# Altium PCB V2_PCB.PcbDoc (part 1 of 2)
Units mil, origin at the board's own origin, x right, y up, seen from the top; angles counter-clockwise.
Board outline 7874.02 x 5669.29 mil, 2 copper layers (Top Layer, Bottom Layer); 198 components, 155 nets, 639 pads, 218 vias.
Unrouted connection lines stored in the file: 3.
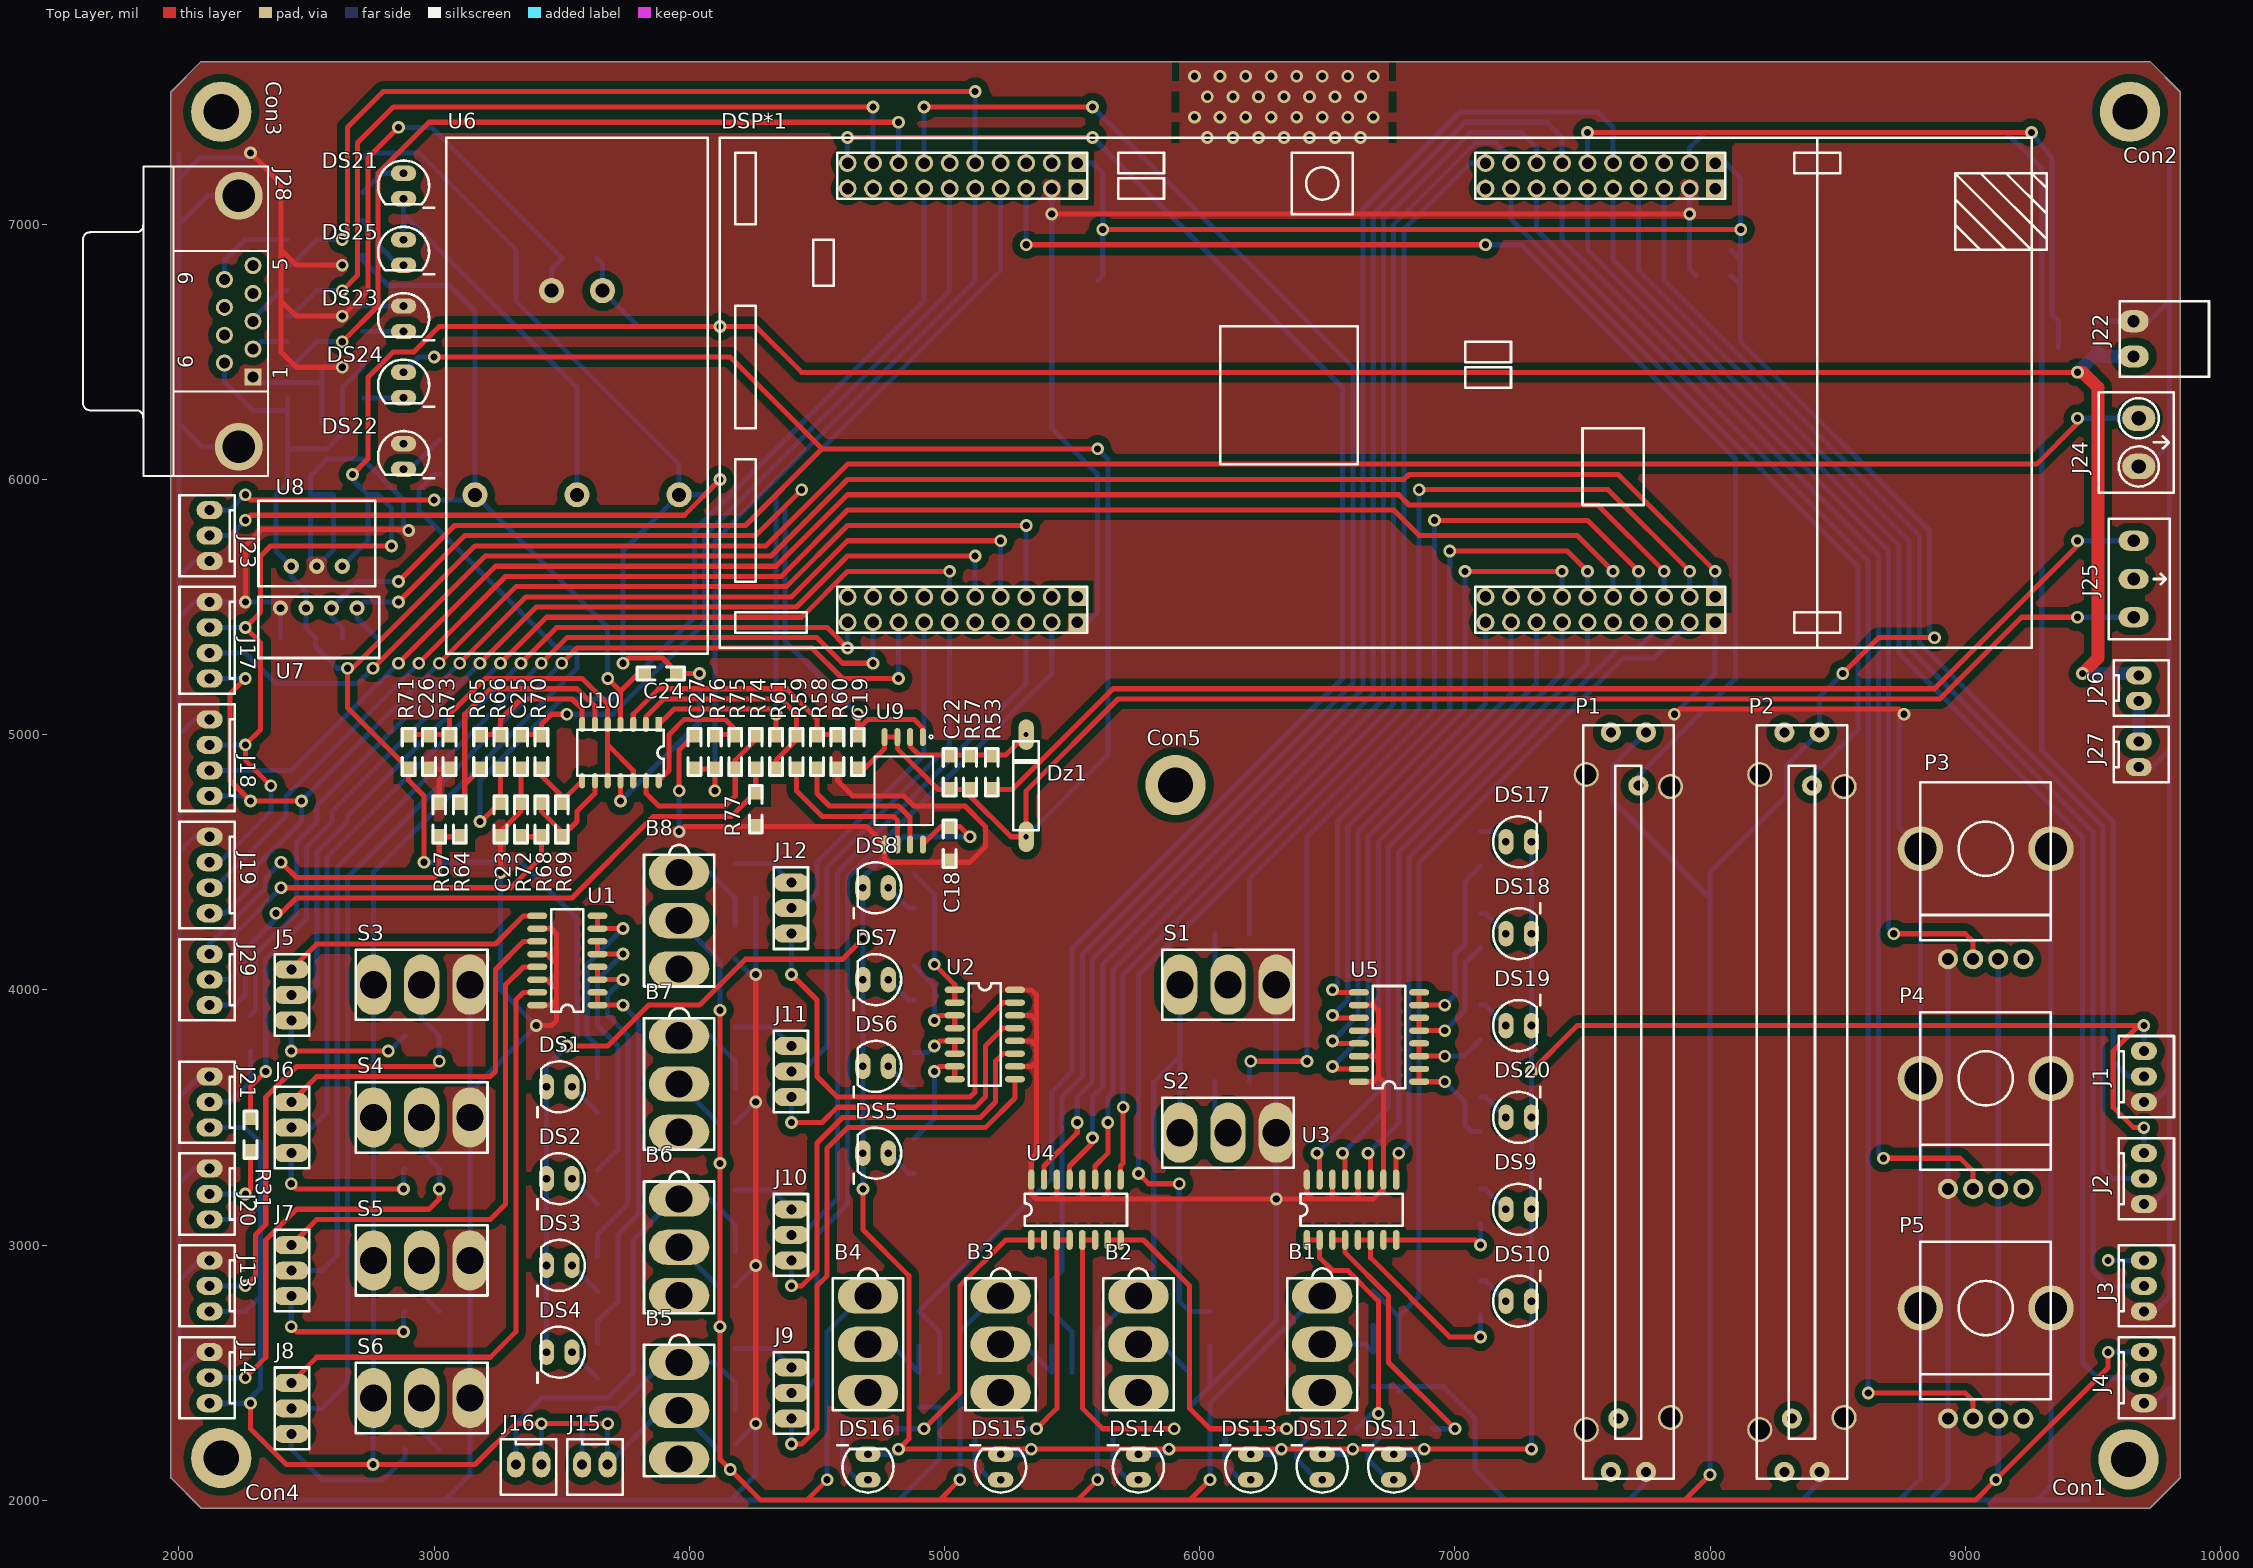
[diagram p0: Top Layer view]
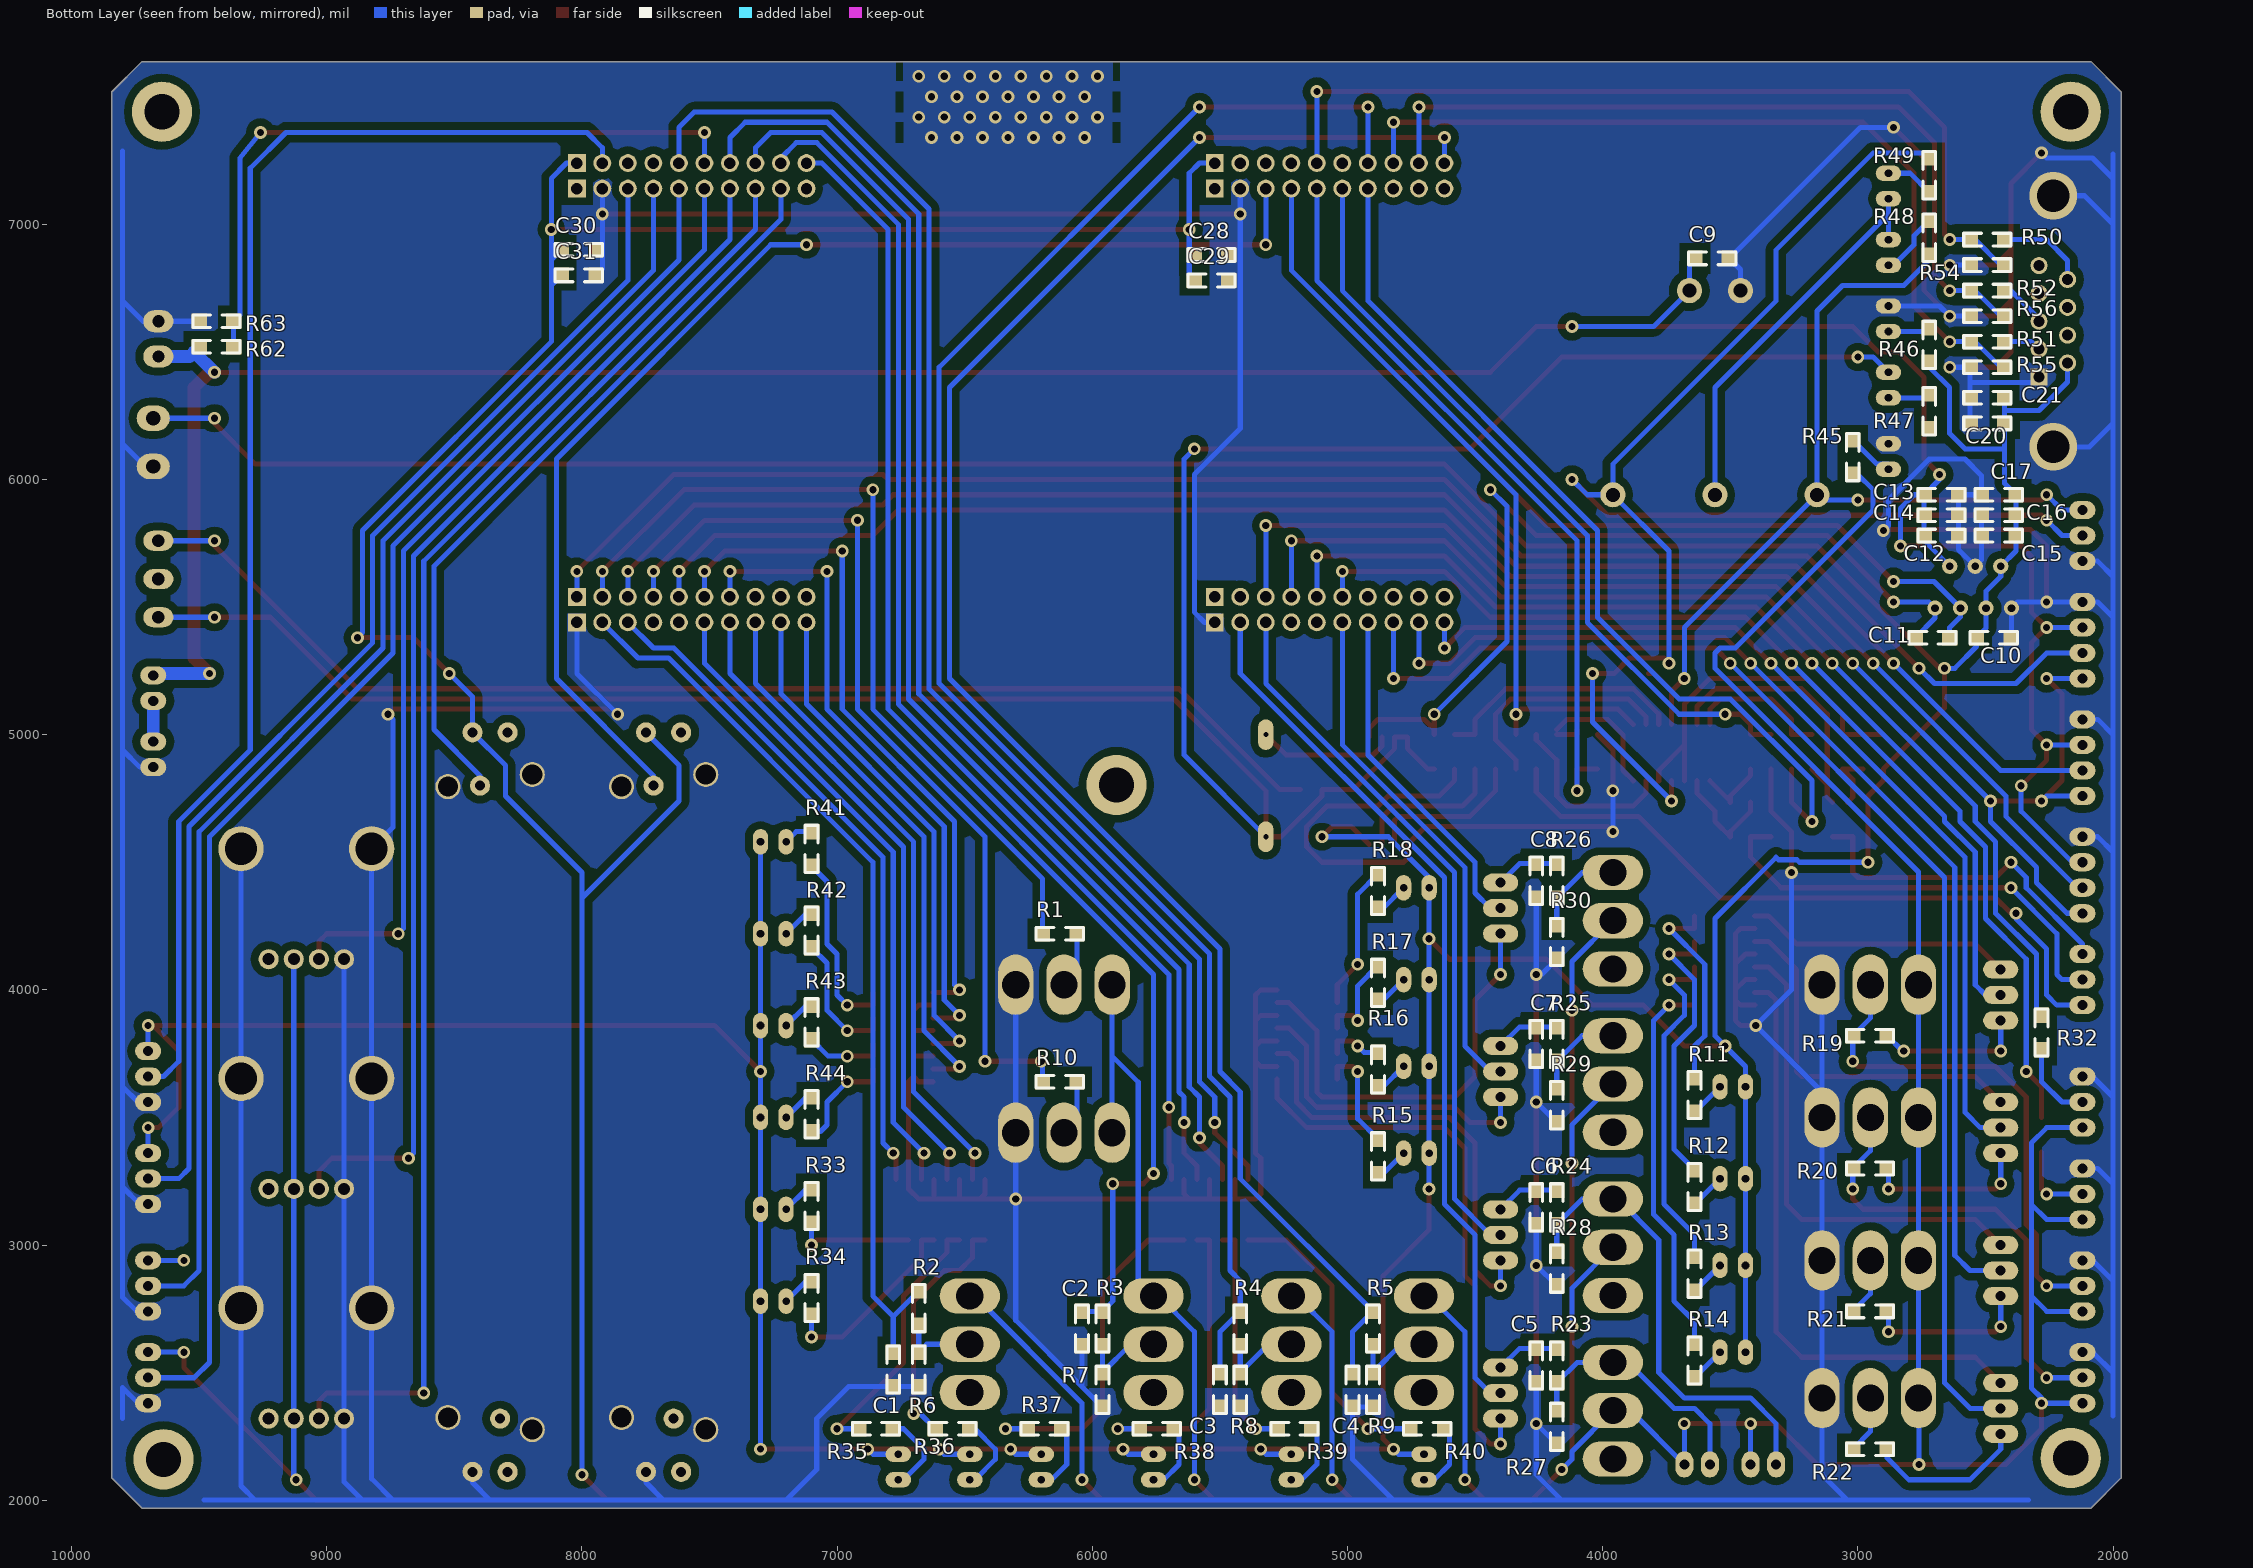
[diagram p1: Bottom Layer view, seen from below]

## Layer stack, top to bottom
Top Solder: solder mask 0.4, Solder Resist, Dk 3.5
Top Layer: signal copper 1.4
Dielectric 1: dielectric 12.6, FR-4, Dk 4.8
Bottom Layer: signal copper 1.4
Bottom Solder: solder mask 0.4, Solder Resist, Dk 3.5

## Board outline
2086.61,1968.5 9724.41,1968.5 9842.52,2086.61 9842.52,7519.69 9724.41,7637.8 2086.61,7637.8 1968.5,7519.69 1968.5,2086.61

## Design rules (kind name [scope] priority, off if disabled: settings)
Clearance [All] p1: gap=15 except(30: Arc-Poly Track-Poly SMDPad-Poly THPad-Poly Via-Poly Fill-Poly Poly-Poly)
ComponentClearance [All] p1: gap=10 collisioncheckmode=3 verticalgap=196.85 showdistances=FALSE
PlaneConnect [All] p1: planeconnectstyle=Direct reliefexpansion=20 reliefentries=4 reliefconductorwidth=10 reliefairgap=10
PolygonConnect [All] p1: connectstyle=Direct reliefconductorwidth=10 reliefentries=4 polygonreliefangle="90 Angle" airgapwidth=10
RoutingVias [All] p1: holewidth=28 width=50 viastyle="Through Hole" minholewidth=28 minwidth=50 maxholewidth=28 maxwidth=50
SolderMaskExpansion [All] p1: expansion=4
Width [All] p1: maxlimit=100 minlimit=10 preferedwidth=20
28 further rules are at their usual default settings.

## Classes and differential pairs
component class Supplies: C9 C10 C11 C12 C13 C14 C15 C16 C17 DS21 DS22 DS23 DS24 DS25 DS? J22 J23 J24 J25 J26 J27 J? R45 R46 R47 R48 R49 R? U6 U7 U8 U?
component class InputsExtras: B5 B6 B7 B8 C5 C6 C7 C8 DS1 DS2 DS3 DS4 DS5 DS6 DS7 DS8 J5 J6 J7 J8 J9 J10 J11 J12 J13 J14 J15 J16 R11 R12 R13 R14 R15 R16 R17 R18 R19 R20 R21 R22 R23 R24 R25 R26 R27 R28 R29 R30 S3 S4 S5 S6 U1 U2
component class Inputs: B1 B2 B3 B4 C1 C2 C3 C4 J1 J2 J3 J4 P1 P2 P3 P4 P5 R1 R2 R3 R4 R5 R6 R7 R8 R9 R10 S1 S2
component class DSP: C28 C29 C30 C31 DSP*1
component class SignalProcessing: C18 C19 C20 C21 C22 C23 C24 C25 C26 C27 Dz1 J28 J29 R50 R51 R52 R53 R54 R55 R56 R57 R58 R59 R60 R61 R62 R63 R64 R65 R66 R67 R68 R69 R70 R71 R72 R73 R74 R75 R76 R77 U9 U10
component class Outputs: Con1 Con2 Con3 Con4 Con5 DS9 DS10 DS11 DS12 DS13 DS14 DS15 DS16 DS17 DS18 DS19 DS20 J17 J18 J19 J20 J21 R31 R32 R33 R34 R35 R36 R37 R38 R39 R40 R41 R42 R43 R44 U3 U4 U5

## Components (designator, comment, footprint, x,y, rotation, side; value= is the part's Value field where it differs from the comment)
B1 "Button_TH" BUTTONTH 6480,2800 r270 top
B2 "Button_TH" BUTTONTH 5760,2800 r270 top
B3 "Button_TH" BUTTONTH 5220,2800 r270 top
B4 "Button_TH" BUTTONTH 4700,2800 r270 top
B5 "Button_TH" BUTTONTH 3960,2540 r270 top
B6 "Button_TH" BUTTONTH 3960,3180 r270 top
B7 "Button_TH" BUTTONTH 3960,3820 r270 top
B8 "Button_TH" BUTTONTH 3960,4460 r270 top
C1 "nF" 1206 6780,2580 r270 bottom
C2 "nF" 1206 6040,2740 r270 bottom
C3 "nF" 1206 5500,2500 r270 bottom
C4 "nF" 1206 4980,2500 r270 bottom
C5 "nF" 1206 4260,2460 r90 bottom
C6 "nF" 1206 4260,3080 r90 bottom
C7 "nF" 1206 4260,3720 r90 bottom
C8 "nF" 1206 4260,4360 r90 bottom
C9 "100nF" 1206 3638.27,6866.61 r180 bottom
C10 "100nF" 1206 2400,5380 r0 bottom
C11 "100nF" 1206 2640,5380 r0 bottom
C12 "100nF" 1206 2740,5780 r180 bottom
C13 "100nF" 1206 2740,5940 r180 bottom
C14 "100nF" 1206 2740,5860 r180 bottom
C15 "100nF" 1206 2380,5780 r0 bottom
C16 "100nF" 1206 2380,5860 r0 bottom
C17 "100nF" 1206 2380,5940 r0 bottom
C18 "100nF" 1206 5020,4640 r270 top
C19 "100nF" 1206 4660,5000 r270 top
C20 "1uF" 1206 2560,6220 r180 bottom
C21 "100nF" 1206 2560,6320 r180 bottom
C22 "10nF" 1206 5020,4920 r270 top
C23 "100nF" 1206 3260,4600 r90 top
C24 "100nF" 1206 3820,5240 r0 top
C25 "100nF" 1206 3340,5000 r270 top
C26 "10nF" 1206 2980,5000 r270 top
C27 "100nF" 1206 4020,5000 r270 top
C28 "nF" 1206 5600,6880 r180 bottom
C29 "nF" 1206 5600,6780 r180 bottom
C30 "nF" 1206 8080,6900 r180 bottom
C31 "nF" 1206 8080,6800 r180 bottom
Con1 "CON1" SUPPORT 9640,2160 r0 top
Con2 "CON1" SUPPORT 9645.67,7440.94 r0 top
Con3 "CON1" SUPPORT 2165.35,7440.94 r0 top
Con4 "CON1" SUPPORT 2165.35,2165.35 r0 top
Con5 "CON1" SUPPORT 5905.51,4803.15 r0 top
DS1 "Verde" LED_100MIL 3440,3620 r90 top
DS2 "Verde" LED_100MIL 3440,3260 r90 top
DS3 "Verde" LED_100MIL 3440,2920 r90 top
DS4 "Verde" LED_100MIL 3440,2580 r90 top
DS5 "Verde" LED_100MIL 4680,3360 r90 top
DS6 "Verde" LED_100MIL 4680,3700 r90 top
DS7 "Verde" LED_100MIL 4680,4040 r90 top
DS8 "Verde" LED_100MIL 4680,4400 r90 top
DS9 "Verde" LED_100MIL 7300,3140 r270 top
DS10 "Verde" LED_100MIL 7300,2780 r270 top
DS11 "Verde" LED_100MIL 6760,2180 r0 top
DS12 "Verde" LED_100MIL 6480,2180 r0 top
DS13 "Verde" LED_100MIL 6200,2180 r0 top
DS14 "Verde" LED_100MIL 5760,2180 r0 top
DS15 "Verde" LED_100MIL 5220,2180 r0 top
DS16 "Verde" LED_100MIL 4700,2180 r0 top
DS17 "Verde" LED_100MIL 7300,4580 r270 top
DS18 "Verde" LED_100MIL 7300,4220 r270 top
DS19 "Verde" LED_100MIL 7300,3860 r270 top
DS20 "Verde" LED_100MIL 7300,3500 r270 top
DS21 "Verde" LED_100MIL 2880,7100 r180 top
DS22 "Verde" LED_100MIL 2880,6040 r180 top
DS23 "Verde" LED_100MIL 2880,6580 r180 top
DS24 "Verde" LED_100MIL 2880,6320 r180 top
DS25 "Verde" LED_100MIL 2880,6840 r180 top
DSP*1 "F28069M_DevelopmentBoard" F28069M_DevelopmentBoardDOWN 8020,7240 r270 top
Dz1 "v" DIODO 5320,4600 r90 top
J1 "Cleva 2 vias" CON3_KK_256 9700,3760 r270 top
J2 "Cleva 2 vias" CON3_KK_256 9700,3360 r270 top
J3 "Cleva 2 vias" CON3_KK_256 9700,2940 r270 top
J4 "Cleva 2 vias" CON3_KK_256 9700,2580 r270 top
J5 "Cleva 2 vias" CON_3_100MILIS 2440,3880 r180 top
J6 "Cleva 2 vias" CON_3_100MILIS 2440,3360 r180 top
J7 "Cleva 2 vias" CON_3_100MILIS 2440,2800 r180 top
J8 "Cleva 2 vias" CON_3_100MILIS 2440,2260 r180 top
J9 "Cleva 2 vias" CON_3_100MILIS 4400,2520 r0 top
J10 "Cleva 2 vias" CON_3_100MILIS 4400,3140 r0 top
J11 "Cleva 2 vias" CON_3_100MILIS 4400,3780 r0 top
J12 "Cleva 2 vias" CON_3_100MILIS 4400,4420 r0 top
J13 "Cleva 2 vias" CON3_KK_256 2120,2740 r90 top
J14 "Cleva 2 vias" CON3_KK_256 2120,2380 r90 top
J15 "Cleva 2 vias" CON2_KK_256 3680,2140 r180 top
J16 "Cleva 2 vias" CON2_KK_256 3420,2140 r180 top
J17 "Cleva 2 vias" CON4_KK_256 2120,5220 r90 top
J18 "Cleva 2 vias" CON4_KK_256 2120,4760 r90 top
J19 "Cleva 2 vias" CON4_KK_256 2120,4300 r90 top
J20 "Cleva 2 vias" CON3_KK_256 2120,3100 r90 top
J21 "Cleva 2 vias" CON3_KK_256 2120,3460 r90 top
J22 "Cleva 2 vias" Con2_ExtronSide_3.5mmPitch 9660,6620 r270 top
J23 "Cur_meas_con" CON3_KK_256 2120,5680 r90 top
J24 "Cleva 2 vias" Clema_2_vias 9680,6240 r270 top
J25 "Cleva 2 vias" Con3_150milPitch 9660,5760 r270 top
J26 "Cleva 2 vias" CON2_KK_256 9680,5232.6 r270 top
J27 "Cleva 2 vias" CON2_KK_256 9680,4972.6 r270 top
J28 "D Connector 9" DSUB1.385-2H9 1860,6620 r90 top
J29 "Cleva 2 vias" Con3_KK_256 2120,3940 r90 top
P1 "POT" SliderPot_PTA6044 7680,3560 r270 top
P2 "POT" SliderPot_PTA6044 8360,3560 r270 top
P3 "POT" POT_RK11K1140A3L 9080,4120 r0 top
P4 "POT" POT_RK11K1140A3L 9080,3220 r0 top
P5 "POT" POT_RK11K1140A3L 9080,2320 r0 top
R1 "RK" 1206 6060,4220 r0 bottom
R2 "RK" 1206 6680,2820 r270 bottom
R3 "RK" 1206 5960,2740 r270 bottom
R4 "RK" 1206 5420,2740 r270 bottom
R5 "RK" 1206 4900,2740 r270 bottom
R6 "RK" 1206 6680,2580 r270 bottom
R7 "RK" 1206 5960,2500 r270 bottom
R8 "RK" 1206 5420,2500 r270 bottom
R9 "RK" 1206 4900,2500 r270 bottom
R10 "RK" 1206 6060,3640 r0 bottom
R11 "RK" 1206 3640,3520 r90 bottom
R12 "RK" 1206 3640,3160 r90 bottom
R13 "RK" 1206 3640,2820 r90 bottom
R14 "RK" 1206 3640,2480 r90 bottom
R15 "RK" 1206 4880,3280 r90 bottom
R16 "RK" 1206 4880,3620 r90 bottom
R17 "RK" 1206 4880,3960 r90 bottom
R18 "RK" 1206 4880,4320 r90 bottom
R19 "RK" 1206 3020,3820 r180 bottom
R20 "RK" 1206 3020,3300 r180 bottom
R21 "RK" 1206 3020,2740 r180 bottom
R22 "RK" 1206 3020,2200 r180 bottom
R23 "RK" 1206 4180,2460 r90 bottom
R24 "RK" 1206 4180,3080 r90 bottom
R25 "RK" 1206 4180,3720 r90 bottom
R26 "RK" 1206 4180,4360 r90 bottom
R27 "RK" 1206 4180,2220 r90 bottom
R28 "RK" 1206 4180,2840 r90 bottom
R29 "RK" 1206 4180,3480 r90 bottom
R30 "RK" 1206 4180,4120 r90 bottom
R31 "RK" 1206 2280,3500 r270 top
R32 "RK" 1206 2280,3900 r270 bottom
R33 "RK" 1206 7100,3220 r270 bottom
R34 "RK" 1206 7100,2860 r270 bottom
R35 "RK" 1206 6780,2280 r0 bottom
R36 "RK" 1206 6480,2280 r0 bottom
R37 "RK" 1206 6120,2280 r0 bottom
R38 "RK" 1206 5680,2280 r0 bottom
R39 "RK" 1206 5140,2280 r0 bottom
R40 "RK" 1206 4620,2280 r0 bottom
R41 "RK" 1206 7100,4620 r270 bottom
R42 "RK" 1206 7100,4300 r270 bottom
R43 "RK" 1206 7100,3940 r270 bottom
R44 "RK" 1206 7100,3580 r270 bottom
R45 "65R" 1206 3020,6020 r90 bottom
R46 "150R" 1206 2720,6460 r90 bottom
R47 "150R" 1206 2720,6200 r90 bottom
R48 "650R" 1206 2720,6880 r90 bottom
R49 "650R" 1206 2720,7260 r270 bottom
R50 "1k" 1206 2560,6940 r180 bottom
R51 "1k" 1206 2560,6540 r180 bottom
R52 "1k" 1206 2560,6740 r180 bottom
R53 "21.5k" 1206 5185,4920 r270 top
R54 "1.78k" 1206 2560,6840 r180 bottom
R55 "1.78k" 1206 2560,6440 r180 bottom
R56 "1.78k" 1206 2560,6640 r180 bottom
R57 "1k" 1206 5100,4920 r270 top
R58 "10k" 1206 4500,5000 r270 top
R59 "10k" 1206 4420,5000 r270 top
R60 "16.2k" 1206 4580,4865 r90 top
R61 "16.2k" 1206 4340,5000 r270 top
R62 "8.2k" 1206 9500,6520 r180 bottom
R63 "1k" 1206 9500,6620 r180 bottom
R64 "10k" 1206 3100,4600 r90 top
R65 "10k" 1206 3180,5000 r270 top
R66 "2.61k" 1206 3260,5000 r270 top
R67 "9.09R" 1206 3020,4600 r90 top
R68 "10k" 1206 3420,4600 r90 top
R69 "10k" 1206 3500,4600 r90 top
R70 "2.61k" 1206 3420,5000 r270 top
R71 "61.9k" 1206 2900,5000 r270 top
R72 "9.09R" 1206 3340,4600 r90 top
R73 "12.1k" 1206 3060,5000 r270 top
R74 "10k" 1206 4260,5000 r270 top
R75 "10k" 1206 4180,5000 r270 top
R76 "2.61k" 1206 4100,5000 r270 top
R77 "9.09R" 1206 4260,4640 r90 top
S1 "Switch" SWITCHTH_2POS 6300,4020 r180 top
S2 "Switch" SWITCHTH_2POS 6300,3440 r180 top
S3 "Switch" SWITCHTH_2POS 3140,4020 r180 top
S4 "Switch" SWITCHTH_2POS 3140,3500 r180 top
S5 "Switch" SWITCHTH_2POS 3140,2940 r180 top
S6 "Switch" SWITCHTH_2POS 3140,2400 r180 top
U1 "MMPQ3904" SO-16 3640,3940 r180 top
U2 "MMPQ3904" SO-16 5040,4000 r0 top
U3 "MMPQ3904" SO-16 6420,3020 r90 top
U4 "MMPQ3904" SO-16 5340,3020 r90 top
U5 "MMPQ3904" SO-16 6860,3640 r180 top
U6 "TEL15-2423" TEL15-2423 3560,6340 r270 top
U7 "CRE1S0505" CRE1S0505SC 2547.72,5496.06 r0 top
U8 "TSR 1-2450" "TSR 1-2450" 2540,5660 r180 top
U9 "ACPL-C870-000E" SOIC127P1150X360-8N 4840,4780 r270 top
U10 "LM324" SOIC_14 3880,5040 r270 top

## Footprints (in the part's own frame and the unit in brackets; to place one, negate y for a bottom-side part, rotate by r counter-clockwise, add the part's x,y. Pads: shape width x height; smd on the part's side, far side on the other; paste and mask are expansions set on the pad)
1206 [mil] "SMD R&C"
  rect 60x60 smd: 1(0,0) 2(135,0)
  silkscreen extent -25,-25 160,25
BUTTONTH [mm]
  oval 3.5x6 hole 2.7: 0(0,0) 1(4.8,0) 2(9.6,0)
  silkscreen extent -2.75,-3.5 11.35,3.5
Clema_2_vias [mm] "Conector 2 vias"
  oval 2.54x3.302 hole 1.4: 1(0,0) 2(4.8,0)
  silkscreen extent -2.6,-4 7.4,3.5
Con2_ExtronSide_3.5mmPitch [mm]
  oval 2.2x3 hole 1.2: 1(0,0) 2(3.5,0)
  silkscreen extent -2,-1.4 5.5,7.5
CON2_KK_256 [mm]
  oval 1.8x2.6 hole 1: 1(0,0) 2(2.54,0)
  silkscreen extent -1.5,-2.5 4.04,3
Con3_150milPitch [mm]
  oval 2x3 hole 1.27: 1(0,0) 2(3.81,0) 3(7.62,0)
  silkscreen extent -2.2,-2.5 9.8,3.6
CON3_KK_256 [mm]
  oval 1.8x2.6 hole 1: 1(0,0) 2(2.54,0) 3(5.08,0)
  silkscreen extent -1.5,-2.5 6.58,3
Con3_KK_256 [mm]
  oval 1.8x2.6 hole 1: 1(0,0) 2(2.54,0) 3(5.08,0)
  silkscreen extent -1.5,-2.5 6.58,3
CON4_KK_256 [mm]
  oval 1.8x2.6 hole 1: 1(0,0) 2(2.54,0) 3(5.08,0) 4(7.62,0)
  silkscreen extent -1.5,-2.5 9.12,3
CON_3_100MILIS [mm]
  oval 3.5x1.8 hole 1: 1(0,0) 2(0,-2.54) 3(0,-5.08)
  silkscreen extent -1.78,-6.6 1.65,1.52
CRE1S0505SC [mil]
  round 60 hole 30: 1(-150,0) 2(-50,0) 3(50,0) 4(150,0)
  silkscreen extent -237,-196 237,44
DIODO [mil] "Diodo"
  oval 120x60 hole 20: 1(0,0) 2(400,0)
  silkscreen extent 25,-50 375,50
DSUB1.385-2H9 [mm] "Connector; D Subminiature; 9 Position; Right Angle; Pitch 1.385 mm"
  rect 1.69x1.69 hole 1.09: 1(-5.54,-10.92)
  round 1.69 hole 1.09: 2(-2.77,-10.92) 3(0,-10.92) 4(2.77,-10.92) 5(5.54,-10.92) 6(-4.155,-8.08) 7(-1.385,-8.08) 8(1.385,-8.08) 9(4.155,-8.08)
  round 4.76 hole 3.26: 10(-12.495,-9.5) 11(12.495,-9.5)
  silkscreen extent -15.4,-12.4 15.4,6
F28069M_DevelopmentBoardDOWN [mil]
  rect 70x70 hole 45: 1(0,0) 20(1800,0) 21(100,0) 40(1700,0) 41(0,-2500) 60(1800,-2500) 61(100,-2500) 80(1700,-2500)
  round 70 hole 45: 2(0,-100) 3(0,-200) 4(0,-300) 5(0,-400) 6(0,-500) 7(0,-600) 8(0,-700) 9(0,-800) 10(0,-900) 11(1800,-900) 12(1800,-800) 13(1800,-700) 14(1800,-600) 15(1800,-500) 16(1800,-400) 17(1800,-300) 18(1800,-200) 19(1800,-100) 22(100,-100) 23(100,-200) 24(100,-300) 25(100,-400) 26(100,-500) 27(100,-600) 28(100,-700) 29(100,-800) 30(100,-900) 31(1700,-900) 32(1700,-800) 33(1700,-700) 34(1700,-600) 35(1700,-500) 36(1700,-400) 37(1700,-300) 38(1700,-200) 39(1700,-100) 42(0,-2600) 43(0,-2700) 44(0,-2800) 45(0,-2900) 46(0,-3000) 47(0,-3100) 48(0,-3200) 49(0,-3300) 50(0,-3400) 51(1800,-3400) 52(1800,-3300) 53(1800,-3200) 54(1800,-3100) 55(1800,-3000) 56(1800,-2900) 57(1800,-2800) 58(1800,-2700) 59(1800,-2600) 62(100,-2600) 63(100,-2700) 64(100,-2800) 65(100,-2900) 66(100,-3000) 67(100,-3100) 68(100,-3200) 69(100,-3300) 70(100,-3400) 71(1700,-3400) 72(1700,-3300) 73(1700,-3200) 74(1700,-3100) 75(1700,-3000) 76(1700,-2900) 77(1700,-2800) 78(1700,-2700) 79(1700,-2600)
  silkscreen extent -100,-3900 1900,1300
LED_100MIL [mil] "no está modificado"
  oval 100x60 hole 30: A(0,0) K(0,-100)
  silkscreen extent -120,-150 100,35
POT_RK11K1140A3L [mm]
  round 4.5 hole 3.2: 1(-6.5,11) 1(6.5,11)
  round 2 hole 1.2: 1(-3.75,0) 2(-1.25,0) 3(1.25,0) ""(3.75,0)
  silkscreen extent -6.5,1.9 6.5,17.6
SliderPot_PTA6044 [mm]
  round 2 hole 1: 1(-36.8,1.75) 1'(-36.8,-1.75) 2(-31.5,1) 2'(31.5,-1) 3(36.8,1.75) 3'(36.8,-1.75)
  round 2.5 hole 2: 3(-32.6,-4.2) 3(-31.4,4.2) 3(31.4,4.2) 3(32.6,-4.2)
  silkscreen extent -37.5,-4.5 37.5,4.5
SO-16 [mm]
  oval 2x0.635 smd: 1(0,0) 2(0,-1.27) 3(0,-2.54) 4(0,-3.81) 5(0,-5.08) 6(0,-6.35) 7(0,-7.62) 8(0,-8.89) 9(6,-8.89) 10(6,-7.62) 11(6,-6.35) 12(6,-5.08) 13(6,-3.81) 14(6,-2.54) 15(6,-1.27) 16(6,0)
  silkscreen extent 1.4,-9.53 4.6,0.64
SOIC127P1150X360-8N [mm]
  oval 1.8x0.6 smd: 1(-5.35,1.905) 2(-5.35,0.635) 3(-5.35,-0.635) 4(-5.35,-1.905) 5(5.35,-1.905) 6(5.35,-0.635) 7(5.35,0.635) 8(5.35,1.905)
  silkscreen extent -5.54,-2.93 3.4,2.93
SOIC_14 [mil]
  rect 60x24 smd: 1(0,0)
  oval 60x24 smd: 2(0,-50) 3(0,-100) 4(0,-150) 5(0,-200) 6(0,-250) 7(0,-300) 8(220.47,-300) 9(220.47,-250) 10(220.47,-200) 11(220.47,-150) 12(220.47,-100) 13(220.47,-50) 14(220.47,0)
  silkscreen extent 20,-320 201,20
SUPPORT [mm]
  round 6 hole 3.5: 1(0,0)
SWITCHTH_2POS [mm]
  oval 3.5x6 hole 2.7: 0(0,0) 1(4.8,0) 2(9.6,0)
  silkscreen extent -1.75,-3.5 11.35,3.5
TEL15-2423 [mm]
  round 2.5 hole 1.4: 1(-10.16,2.54) 2(-10.16,-2.54) 3(10.16,-10.16) 4(10.16,0) 5(10.16,10.16)
  silkscreen extent -25.4,-13 26,13
"TSR 1-2450" [mil]
  round 60 hole 30: 1(-100,0) 2(0,0) 3(100,0)
  silkscreen extent -228,-256 228,79

## Part data
C1 C2 C3 C4 C5 C6 C7 C8 C9 C10 C11 C12 C13 C14 C15 C16 C17 C18 C19 C20 C21 C22 C23 C24 C25 C26 C27 C28 C29 C30 C31: library part Condensador, "Condensador"
DS1 DS2 DS3 DS4 DS5 DS6 DS7 DS8 DS9 DS10 DS11 DS12 DS13 DS14 DS15 DS16 DS17 DS18 DS19 DS20 DS21 DS22 DS23 DS24 DS25: library part Led
Dz1: library part Zener
J1 J2 J3 J4 J5 J6 J7 J8 J9 J10 J11 J12 J13 J14 J20 J21 J23 J25 J29: library part Con_3
J15 J16 J22 J24 J26 J27: library part Con_2
J17 J18 J19: library part Con_4
J28: "Receptacle Assembly, 9 Position, Right Angle"
P1 P2 P3 P4 P5: "POTENCIOMETRO"
R1 R2 R3 R4 R5 R6 R7 R8 R9 R10 R11 R12 R13 R14 R15 R16 R17 R18 R19 R20 R21 R22 R23 R24 R25 R26 R27 R28 R29 R30 R31 R32 R33 R34 R35 R36 R37 R38 R39 R40 R41 R42 R43 R44 R45 R46 R47 R48 R49 R50 R51 R52 R53 R54 R55 R56 R57 R58 R59 R60 R61 R62 R63 R64 R65 R66 R67 R68 R69 R70 R71 R72 R73 R74 R75 R76 R77: library part Resistencia, "Resistencia"
U9: "Isolation Amplifier [Broadcom] ACPL-C870-000E Isolation Amplifier"
U10: library part LMC6484IM_1, "14 pin CMOS Quad Rail to Rail Input and Output Operational Amplifier 55 per tube"

## Via types
v1: diameter 50, hole 28, Top Layer to Bottom Layer, 218 vias

## Nets (pads, with @x,y where several pads share a name; then routed paths per layer and width w, separated by ;. In a path a pad name is that pad's centre, name@x,y a point inside that pad or via, vN(x,y) a via of type N, cw(c..) or ccw(c..) an arc to the next point about the centre after c; other vN are vias at no path point)
3.3V: B1.0 B2.0 B3.0 B4.0 B5.1 B6.1 B7.1 B8.1 C28.1 C29.1 C30.1 C31.1 DSP*1.1 DSP*1.41 J3.1 J4.1 J13.1 J14.1 J15.1 J16.1 J20.1 J21.1 P1.1 P2.1 P3.3 P4.3 P5.3 R45.1 S1.2 S2.2 S3.2 S4.2 S5.2 S6.2 | length 35707.3
  Top Layer w20: v1(2280,2380) 2280,2280 2420,2140 v1(2760,2140) 3160,2140 3320,2300 v1(3420,2300) v1(3680,2300) ; v1(4120,3920) v1(4120,3320) v1(4120,2680) 4120,2160 v1(4160,2120) 4280,2000 4460,2000 ; v1(4540,2080) 4460,2000 ; v1(5060,2080) 4980,2000 ; v1(5600,2080) 5520,2000 ; v1(5620,6980) v1(8120,6980) ; v1(6040,2080) 5960,2000 ; 7900,2000 v1(8000,2100) ; v1(8520,5240) 8660,5380 v1(8880,5380) ; v1(9560,2580) 9560,2520 v1(9120,2080) 9040,2000 5960,2000 ; 4460,2000 4980,2000 ; 4980,2000 5520,2000 ; 5520,2000 5960,2000
  Bottom Layer w20: J14.1@2120,2380 v1(2280,2380) 2280,2400 2320,2440 2320,3400 2260,3460 J21.1@2120,3460 ; J13.1@2120,2740 2260,2740 2320,2800 ; J20.1@2120,3100 2260,3100 2320,3160 ; v1(2760,2140) S6.2@2760,2397.95 ; S6.2@2762.05,2400 S5.2@2762.05,2940 S4.2@2762.05,3500 S3.2@2762.05,4020 2762.05,4462.05 3560,5260 3560,5320 3540,5340 3480,5340 2940,5880 2940,5960 3000,6020 R45.1@3020,6020 ; J16.1@3420,2140 v1(3420,2300) ; v1(3680,2300) J15.1@3680,2140 3891.02,2351.02 B5.1@3960,2351.02 4120,2191.02 4120,2160 v1(4160,2120) ; B6.1@3960,2991.02 4120,2831.02 v1(4120,2680) ; B7.1@3960,3631.02 4120,3471.02 v1(4120,3320) ; B8.1@3960,4271.02 4120,4111.02 v1(4120,3920) ; v1(4540,2080) 4540,2660 B4.0@4700,2820 ; v1(5060,2080) 5060,2660 5200,2800 B3.0@5220,2800 ; DSP*1.41@5520,7240 5580,7240 5620,7200 v1(5620,6980) 5620,6800 C29.1@5600,6780 ; v1(5600,2080) 5600,2660 5740,2800 B2.0@5760,2800 5820,2860 5820,3637.95 5922.05,3740 ; S2.2@5922.05,3440 S1.2@5922.05,4020 ; v1(6040,2080) 6040,2380 6460,2800 B1.0@6480,2800 ; P1.1@7748.9,5008.82 7620,4879.92 7620,4740 8000,4360 8000,4460 ; v1(8000,2100) 8000,4460 ; DSP*1.1@8020,7240 8060,7240 8120,7180 v1(8120,6980) 8120,6860 ; C31.1@8080,6800 8120,6760 ; C30.1@8080,6900 8120,6860 ; v1(8520,5240) 8428.9,5148.9 P2.1@8428.9,5008.82 8300,4879.92 8300,4760 8000,4460 ; v1(8880,5380) 8860,5400 8860,5800 8120,6540 8120,6760 ; v1(9120,2080) 9129.21,2089.21 P5.3@9129.21,2320 P4.3@9129.21,3220 P3.3@9129.21,4120 ; v1(9560,2580) J4.1@9700,2580 ; v1(9560,2940) J3.1@9700,2940 ; 8120,6760 8120,6860
5V: C10.2 C15.1 C16.1 C17.1 C18.1 C20.2 C21.2 DS1.A DS2.A DS3.A DS4.A DS5.A DS6.A DS7.A DS8.A DS9.A DS10.A DS11.A DS12.A DS13.A DS14.A DS15.A DS16.A DS17.A DS18.A DS19.A DS20.A J1.1 J2.1 J24.1 J28.6 R46.1 R71.2 U7.2 U8.3 U9.8 | length 26119.1
  Top Layer w20: v1(2960,4500) 2960,4760 2900,4820 R71.2@2900,4865 2660,5105 v1(2660,5260) 2680,5260 3160,5740 4300,5740 4620,6060 9280,6060 9440,6220 v1(9440,6240) ; v1(3520,3780) 3680,3780 3840,3940 4040,3940 4220,4120 4600,4120 v1(4680,4200) ; v1(4680,3220) 4680,3060 4860,2880 4860,2240 v1(4820,2200) v1(5340,2200) v1(6320,2200) v1(6600,2200) v1(6880,2200) v1(7300,2200) ; U9.8@4915,4569.37 4985.63,4640 C18.1@5020,4640 5060,4640 v1(5100,4600) ; v1(7300,3680) 7480,3860 v1@9680,3860 ; v1(9700,3460) 9660,3460 9580,3540 9580,3760 v1@9680,3860 ; v1(9700,3860) v1@9680,3860
  Bottom Layer w20: J28.6@2178.11,6456.42 2178.11,6381.89 2290,6270 2425,6270 ; C21.2@2425,6320 2425,6270 ; v1(2660,5260) 2620,5260 2535,5345 C10.2@2535,5380 2497.72,5417.28 U7.2@2497.72,5496.06 2497.72,5562.28 2440,5620 U8.3@2440,5660 2380,5720 C15.1@2380,5780 C16.1@2380,5860 C17.1@2380,5940 2425,5985 2425,6120 ; R46.1@2720,6460 2720,6440 2640,6360 2640,6180 2580,6120 2425,6120 ; v1(2960,4500) 3229.29,4500 3239.29,4510 3310,4510 3320,4520 3560,4280 3560,3820 3440,3700 DS1.A@3440,3620 DS2.A@3440,3260 DS3.A@3440,2920 DS4.A@3440,2580 ; v1(4680,3220) DS5.A@4680,3360 DS6.A@4680,3700 DS7.A@4680,4040 v1(4680,4200) DS8.A@4680,4400 4680,4440 4840,4600 v1(5100,4600) ; DS16.A@4700,2180 4800,2180 v1(4820,2200) ; DS15.A@5220,2180 5320,2180 v1(5340,2200) ; DS14.A@5760,2180 5860,2180 v1(5880,2200) ; DS13.A@6200,2180 6300,2180 v1(6320,2200) ; DS12.A@6480,2180 6580,2180 v1(6600,2200) ; DS11.A@6760,2180 6860,2180 v1(6880,2200) ; v1(7300,2200) DS10.A@7300,2780 DS9.A@7300,3140 DS20.A@7300,3500 DS19.A@7300,3860 DS18.A@7300,4220 DS17.A@7300,4580 ; v1(9440,6240) J24.1@9680,6240 ; J2.1@9700,3360 v1(9700,3460) ; J1.1@9700,3760 v1(9700,3860) ; 2425,6120 C20.2@2425,6220 2425,6270
5V_PS: C11.2 C19.1 R47.1 U7.4 U9.1 | length 3507.9
  Top Layer w20: v1(2860,5520) 3120,5780 4260,5780 v1(4440,5960) ; C19.1@4660,5000 C19.1@4660,5020 ; v1(4660,5080) C19.1@4660,5020 ; U9.1@4915,4990.63 4915,5025 4880,5060 4700,5060 C19.1@4660,5020
  Bottom Layer w20: C11.2@2775,5380 2697.72,5457.28 U7.4@2697.72,5496.06 2721.65,5520 v1(2860,5520) ; v1(4440,5960) 4375,5895 4375,5365 v1(4660,5080)
24V: C9.1 C12.1 C13.1 C14.1 J17.3 J18.3 J19.3 J22.2 J26.1 R62.1 U6.1 U8.1 | length 12589.5
  Top Layer w20: v1(2360,4800) 2260,4900 v1(2260,4960) 2320,5020 2320,5360 v1(2260,5420) 2320,5480 2320,5700 2359,5739 v1(2833,5739) ; v1(2680,6020) 2740,6080 2740,6400 2840,6500 2920,6500 3020,6600 v1(4120,6600) 4260,6600 4440,6420 v1(9440,6420)
  Top Layer w50: v1(9440,6420) 9460,6420 9520,6360 9520,5300 v1(9460,5240)
  Bottom Layer w20: J19.3@2120,4500 2160,4500 2360,4700 v1(2360,4800) ; J18.3@2120,4960 v1(2260,4960) ; J17.3@2120,5420 v1(2260,5420) ; U8.1@2640,5660 2740,5760 C12.1@2740,5780 C14.1@2740,5860 C13.1@2740,5940 ; v1(2680,6020) 2680,6000 C13.1@2740,5940 ; v1(2833,5739) 2833,5887 2780,5940 C13.1@2740,5940 ; C9.1@3638.27,6866.61 3660,6844.88 U6.1@3660,6740 3800,6600 v1(4120,6600) ; R62.1@9500,6520 R62.1@9520,6500 ; J26.1@9672.6,5240 J26.1@9680,5232.6
  Bottom Layer w50: v1(9440,6420) R62.1@9520,6500 ; v1(9460,5240) J26.1@9672.6,5240 ; 9537.8,6482.2 J22.2@9660,6482.2
36V: J25.1 R53.2 | length 4890.6
  Top Layer w20: R53.2@5185,4785 5265,4785 5660,5180 8880,5180 9440,5740 v1(9440,5760)
  Bottom Layer w20: v1(9440,5760) J25.1@9660,5760
+15V: C24.1 J23.3 R48.1 U6.3 U10.4 | length 3599.4
  Top Layer w20: v1(2260,5940) 2280,5920 v1(3000,5920) ; v1(3680,5220) 3730,5170 ; U10.4@3730,5040 3730,5170 ; C24.1@3820,5240 3800,5240 3730,5170
  Bottom Layer w20: J23.3@2120,5880 2200,5880 v1(2260,5940) ; R48.1@2720,6880 2720,6860 2820,6760 3060,6760 3160,6660 U6.3@3160,5940 ; v1(3000,5920) 3140,5920 U6.3@3160,5940 ; v1(3680,5220) 3680,5420 U6.3@3160,5940
-15V: C24.2 J23.2 R49.1 U6.5 U10.11 | length 6059
  Top Layer w20: v1(2260,5840) 2280,5860 3980,5860 v1(4120,6000) ; v1(3730,4740) U10.11@3730,4819.53 ; v1(3740,5280) 3760,5300 3895,5300 C24.2@3955,5240 v1(4040,5240)
  Bottom Layer w20: J23.2@2120,5780 2200,5780 v1(2260,5840) ; R49.1@2720,7260 2740,7280 2940,7280 3320,6900 3320,6700 3960,6060 U6.5@3960,5940 ; v1(3730,4740) 4040,5050 v1(4040,5240) ; v1(3740,5280) 3740,5720 U6.5@3960,5940 ; v1(4120,6000) 4060,5940 U6.5@3960,5940
ADC1: DSP*1.64 R61.1 U10.1 | length 2997.6
  Top Layer w20: U10.1@3880,5040 3940,5100 4320,5100 v1(4340,5080) R61.1@4340,5000
  Bottom Layer w20: v1(4340,5080) 4340,5940 5220,6820 DSP*1.64@5220,7140
ADC2: DSP*1.6 R62.2 R63.2 | length 2738.4
  Top Layer w20: v1(7520,7360) v1(9260,7360)
  Bottom Layer w20: DSP*1.6@7520,7240 v1(7520,7360) ; v1(9260,7360) 9340,7260 9340,6645 R63.2@9365,6620 R62.2@9365,6520
ADC3: C23.2 DSP*1.67 R66.2 | length 3571
  Top Layer w20: v1(3180,4660) 3180,4670 3187.5,4662.5 C23.2@3260,4735 R66.2@3260,4865
  Bottom Layer w20: v1(3180,4660) 3180,4820 3500,5140 3700,5140 4020,5460 4020,5800 4920,6700 DSP*1.67@4920,7140
ADC4: C25.1 DSP*1.66 R70.1 | length 3023.3
  Top Layer w20: C25.1@3340,5000 R70.1@3420,5000 3420,5040 3460,5080 v1(3520,5080)
  Bottom Layer w20: v1(3520,5080) 3700,5080 4060,5440 4060,5780 5020,6740 DSP*1.66@5020,7140
ADC5: C27.2 DSP*1.65 R76.2 | length 2942.5
  Top Layer w20: C27.2@4020,4865 R76.2@4100,4865 ; v1(4100,4780) R76.2@4100,4860
  Bottom Layer w20: v1(4100,4780) 4100,5760 5120,6780 DSP*1.65@5120,7140
COM: DS21.A DS25.K U6.4 | length 1601.7
  Bottom Layer w20: DS25.K@2880,6940 DS21.A@2880,7100 2880,7040 3560,6360 U6.4@3560,5940